# EAGLE board 74hc165 extension board (EAGLE 9.2.0)
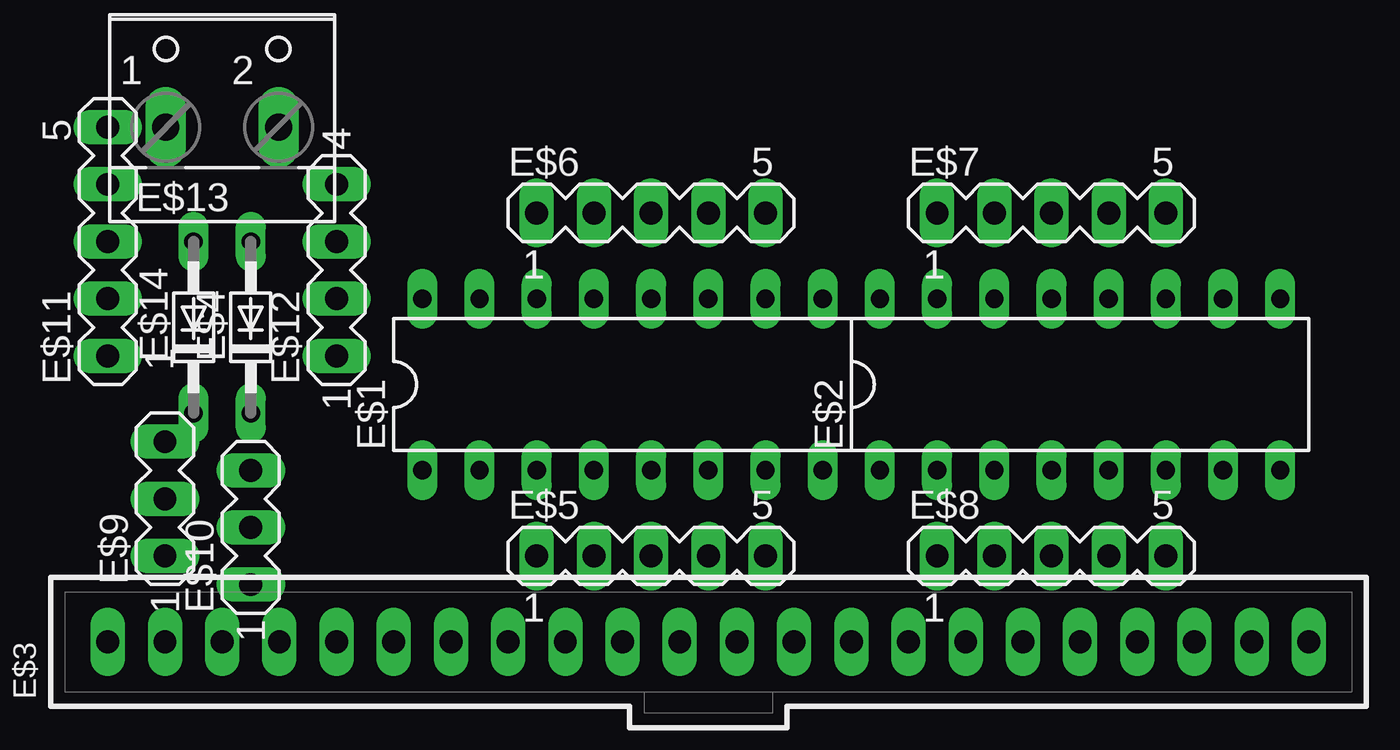
[diagram p0: board, top side]
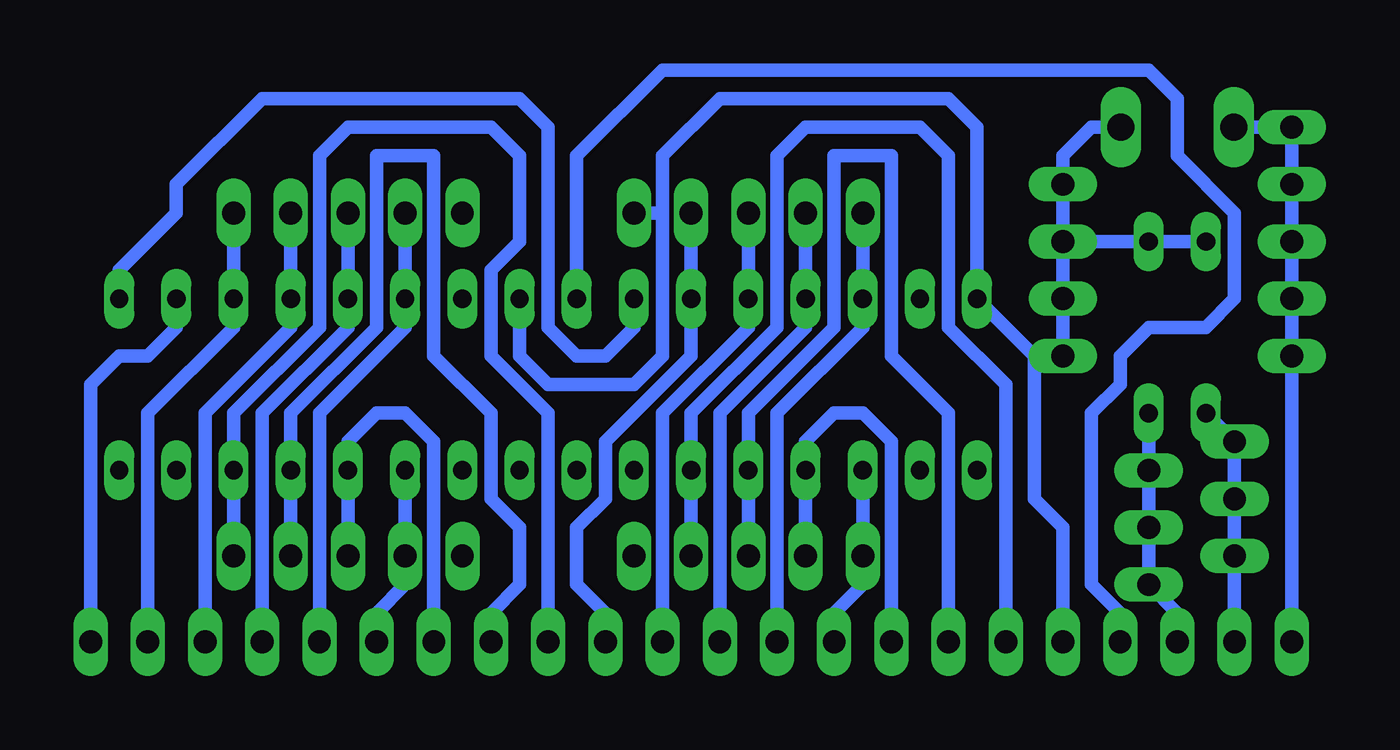
[diagram p1: board, bottom side, seen from below]

No outline drawn. Coordinates in mm, seen from the top.
Copper layers (1*16): Top 0.035mm / dielectric 1.5mm / Bottom 0.035mm
Design rules "default": minimum track width 6mil, minimum drill 0.35mm, track to track 6mil, track to pad 6mil, pad to pad 6mil, via to via 6mil, smd to smd 6mil, copper to edge 40mil, drill to drill 6mil, minimum pad ring 10mil, minimum via ring 8mil, stop-mask expansion 4mil, vias tented up to drill 0mil, thermal gap 10mil

## Footprints (pad centres in the part's own frame; a part is rotated, then mirrored left to right if it is on the bottom)
DIL16 = drill 0.813 long: 1 -8.89,-3.81; 2 -6.35,-3.81; 3 -3.81,-3.81; 4 -1.27,-3.81; 5 1.27,-3.81; 6 3.81,-3.81; 7 6.35,-3.81; 8 8.89,-3.81; 9 8.89,3.81; 10 6.35,3.81; 11 3.81,3.81; 12 1.27,3.81; 13 -1.27,3.81; 14 -3.81,3.81; 15 -6.35,3.81; 16 -8.89,3.81
70543-22 = drill 1.016 long: 1 -26.67,0; 2 -24.13,0; 3 -21.59,0; 4 -19.05,0; 5 -16.51,0; 6 -13.97,0; 7 -11.43,0; 8 -8.89,0; 9 -6.35,0; 10 -3.81,0; 11 -1.27,0; 12 1.27,0; 13 3.81,0; 14 6.35,0; 15 8.89,0; 16 11.43,0; 17 13.97,0; 18 16.51,0; 19 19.05,0; 20 21.59,0; 21 24.13,0; 22 26.67,0
DO34-7 = drill 0.813 long: A 3.81,0; C -3.81,0
MA05-1 = drill 1.016 long: 1 -5.08,0; 2 -2.54,0; 3 0,0; 4 2.54,0; 5 5.08,0
MA03-1 = drill 1.016 long: 1 -2.54,0; 2 0,0; 3 2.54,0
MA04-1 = drill 1.016 long: 1 -3.81,0; 2 -1.27,0; 3 1.27,0; 4 3.81,0
W237-102 = drill 1.194 long: 1 -2.5,-1.27; 2 2.5,-1.27

## Placement (x,y rotation side)
E$1  [DIL16]  40.64,49.53 0 top
E$2  [DIL16]  60.96,49.53 0 top
E$3  [70543-22]  44.45,38.1 0 top
E$4  [DO34-7]  24.13,52.07 90 top
E$5  [MA05-1]  41.91,41.91 0 top
E$6  [MA05-1]  41.91,57.15 0 top
E$7  [MA05-1]  59.69,57.15 0 top
E$8  [MA05-1]  59.69,41.91 0 top
E$9  [MA03-1]  20.32,44.45 90 top
E$10  [MA03-1]  24.13,43.18 90 top
E$11  [MA05-1]  17.78,55.88 90 top
E$12  [MA04-1]  27.94,54.61 90 top
E$13  [W237-102]  22.86,62.23 0 top
E$14  [DO34-7]  21.59,52.07 90 top

## Library data of the parts
E$1 E$2 = 74xx-eu
E$3 = con-molex
E$4 E$14 = diode
E$5-E$12 = con-lstb
E$13 = con-wago-500

## Nets
S$1: E$1.6 E$3.6 E$5.4
S$2: E$1.5 E$3.7 E$5.3
S$3: E$1.4 E$3.8 E$5.2
S$4: E$1.3 E$3.9 E$5.1
S$5: E$1.14 E$3.10 E$6.1
S$6: E$1.13 E$3.11 E$6.2
S$7: E$1.12 E$3.12 E$6.3
S$8: E$1.11 E$3.13 E$6.4
S$9: E$2.6 E$3.14 E$8.5
S$10: E$2.5 E$3.15 E$8.4
S$11: E$2.4 E$3.16 E$8.3
S$12: E$2.3 E$3.17 E$8.2
S$13: E$2.14 E$3.18 E$7.2
S$14: E$2.13 E$3.19 E$7.3
S$15: E$2.12 E$3.20 E$7.4
S$16: E$2.11 E$3.21 E$7.5
S$17: E$2.10 E$3.22
S$18: E$1.10 E$2.9
S$19: E$1.16 E$2.16 E$3.5 E$4.A E$6.5 E$12.1 E$12.2 E$12.3 E$12.4 E$13.2 E$14.A
S$20: E$1.9 E$3.4
S$21: E$3.2 E$9.1 E$9.2 E$9.3 E$14.C
S$22: E$3.3 E$4.C E$10.1 E$10.2 E$10.3
S$23: E$3.1 E$11.1 E$11.2 E$11.3 E$11.4 E$11.5 E$13.1

## Tracks (layer width: path | path; a pad name or v marks a point on that pad's centre or on a via)
S$1
  Bottom 0.61: E$5.4 E$1.6 44.45,48.26 40.64,52.07 40.64,59.69 39.37,60.96 34.29,60.96 33.02,59.69 33.02,52.07 30.48,49.53 E$3.6
S$2
  Bottom 0.61: E$5.3 E$1.5 41.91,48.26 38.1,52.07 38.1,59.69 35.56,59.69 35.56,50.8 33.02,48.26 E$3.7
S$3
  Bottom 0.61: E$5.2 E$1.4 39.37,46.99 38.1,48.26 36.83,48.26 35.56,46.99 E$3.8
S$4
  Bottom 0.61: E$1.3 E$5.1 36.83,40.64 38.1,39.37 E$3.9
S$5
  Bottom 0.61: E$6.1 E$1.14 36.83,52.07 40.64,48.26 E$3.10
S$6
  Bottom 0.61: E$6.2 E$1.13 39.37,52.07 43.18,48.26 E$3.11
S$7
  Bottom 0.61: E$6.3 E$1.12 41.91,52.07 45.72,48.26 E$3.12
S$8
  Bottom 0.61: E$6.4 E$1.11 44.45,50.8 48.26,46.99 48.26,44.45 49.53,43.18 49.53,40.64 48.26,39.37 E$3.13
S$9
  Bottom 0.61: E$8.5 E$2.6 64.77,48.26 60.96,52.07 60.96,59.69 59.69,60.96 53.34,60.96 52.07,59.69 52.07,55.88 53.34,54.61 53.34,50.8 50.8,48.26 E$3.14
S$10
  Bottom 0.61: E$8.4 E$2.5 62.23,48.26 58.42,52.07 58.42,59.69 55.88,59.69 55.88,50.8 53.34,48.26 53.34,44.45 52.07,43.18 52.07,40.64 53.34,39.37 E$3.15
S$11
  Bottom 0.61: E$8.3 E$2.4 59.69,46.99 58.42,48.26 57.15,48.26 55.88,46.99 E$3.16
S$12
  Bottom 0.61: E$2.3 E$8.2 57.15,40.64 58.42,39.37 E$3.17
S$13
  Bottom 0.61: E$7.2 E$2.14 57.15,52.07 60.96,48.26 E$3.18
S$14
  Bottom 0.61: E$7.3 E$2.13 59.69,52.07 63.5,48.26 E$3.19
S$15
  Bottom 0.61: E$7.4 E$2.12 62.23,52.07 66.04,48.26 E$3.20
S$16
  Bottom 0.61: E$7.5 E$2.11 64.77,52.07 68.58,48.26 E$3.21
S$17
  Bottom 0.61: E$2.10 67.31,52.07 68.58,50.8 69.85,50.8 71.12,49.53 E$3.22
S$18
  Bottom 0.61: E$2.9 69.85,54.61 67.31,57.15 67.31,58.42 63.5,62.23 52.07,62.23 50.8,60.96 50.8,52.07 49.53,50.8 48.26,50.8 46.99,52.07 E$1.10
S$19
  Bottom 0.61: 45.72,57.15 45.72,50.8 46.99,49.53 50.8,49.53 52.07,50.8 E$2.16 | 45.72,57.15 45.72,59.69 43.18,62.23 33.02,62.23 31.75,60.96 E$1.16 29.21,50.8 | E$6.5 45.72,57.15 | E$3.5 27.94,43.18 29.21,44.45 29.21,50.8 | E$12.3 E$12.2 E$12.1 29.21,50.8 | E$14.A E$4.A E$12.3 | E$12.3 E$12.4 27.94,59.69 26.67,60.96 E$13.2
S$20
  Bottom 0.61: E$1.9 49.53,59.69 45.72,63.5 24.13,63.5 22.86,62.23 22.86,59.69 20.32,57.15 20.32,53.34 21.59,52.07 24.13,52.07 25.4,50.8 25.4,49.53 26.67,48.26 26.67,40.64 25.4,39.37 E$3.4
S$21
  Bottom 0.61: E$3.2 E$9.1 E$9.2 E$9.3 E$14.C
S$22
  Bottom 0.61: E$3.3 22.86,39.37 E$10.1 E$10.2 E$10.3 E$4.C
S$23
  Bottom 0.61: E$3.1 E$11.1 E$11.2 E$11.3 E$11.4 E$11.5 E$13.1